# Altium PCB Mainboard.PcbDoc
Units mm, origin at the board's own origin, x right, y up, seen from the top; angles counter-clockwise.
Board outline 57.77 x 40.5 mm, 2 copper layers (Top Layer, Bottom Layer); 29 components, 28 nets, 178 pads, 39 vias.
Unrouted connection lines stored in the file: 22.
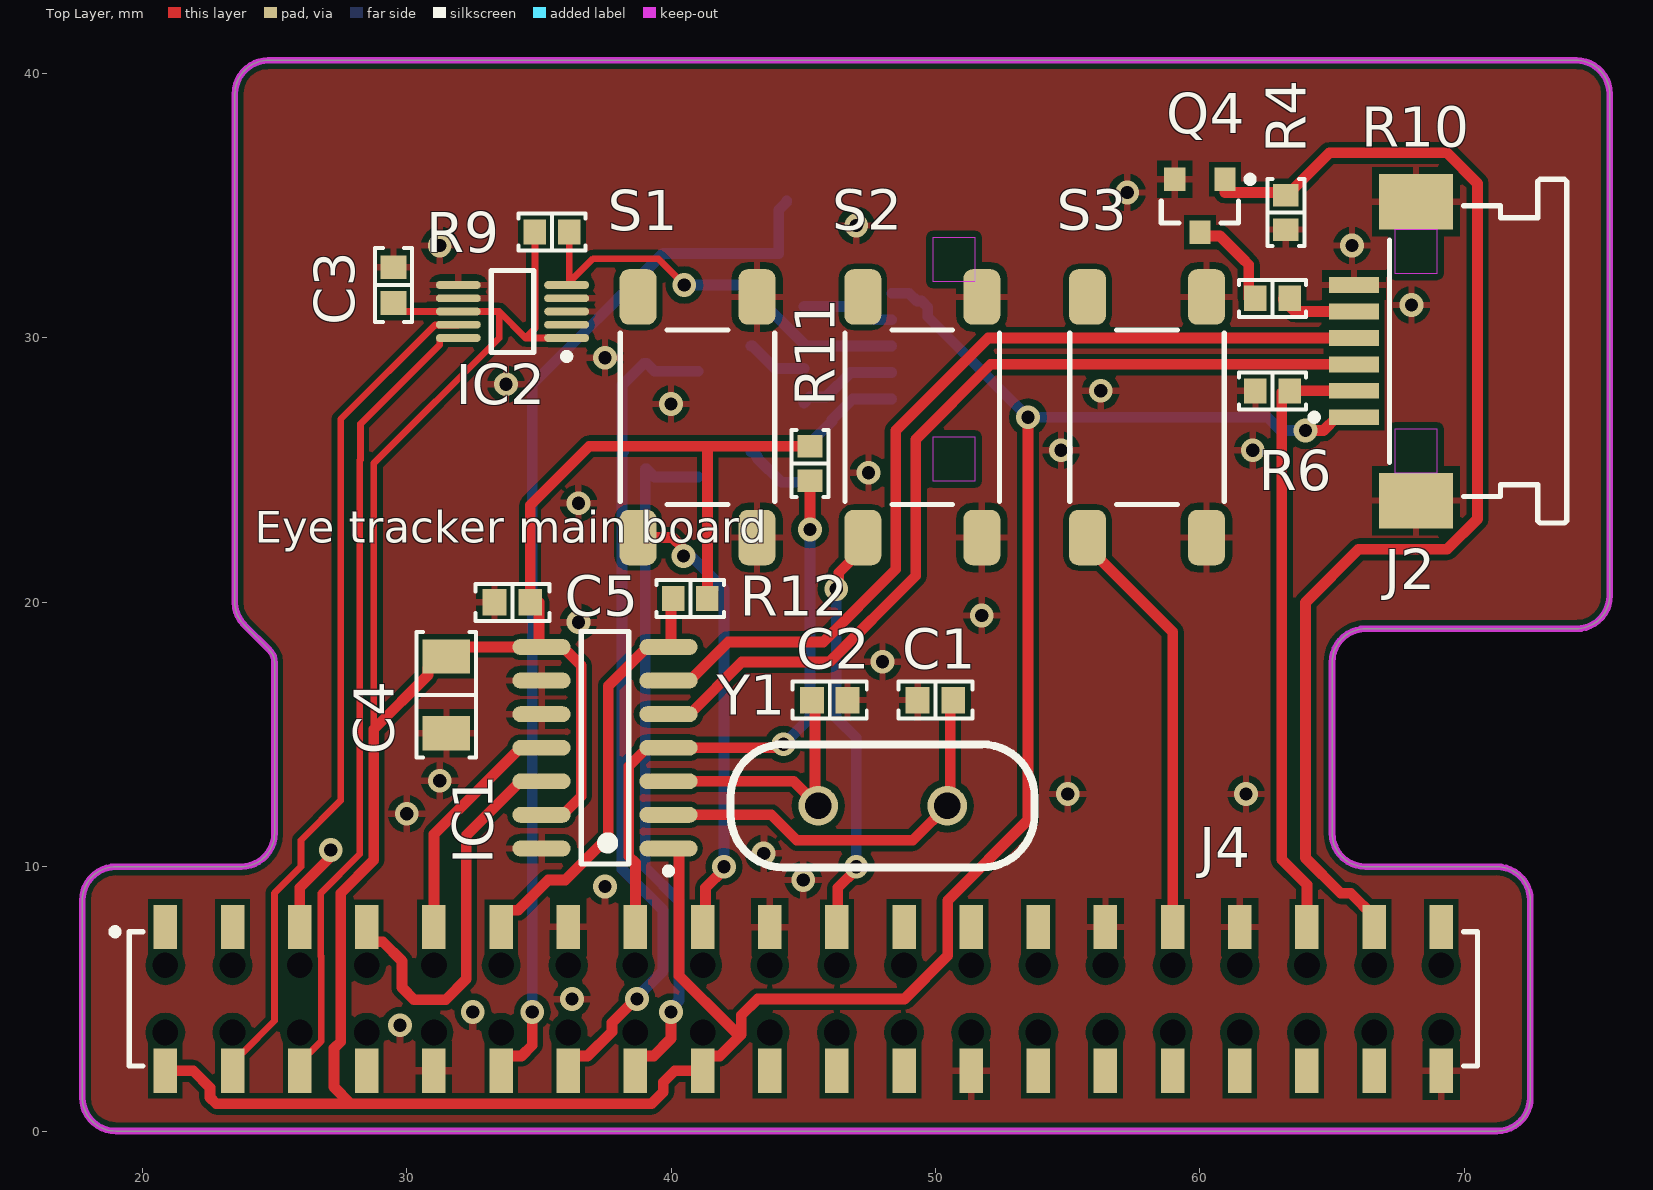
[diagram p0: Top Layer view]
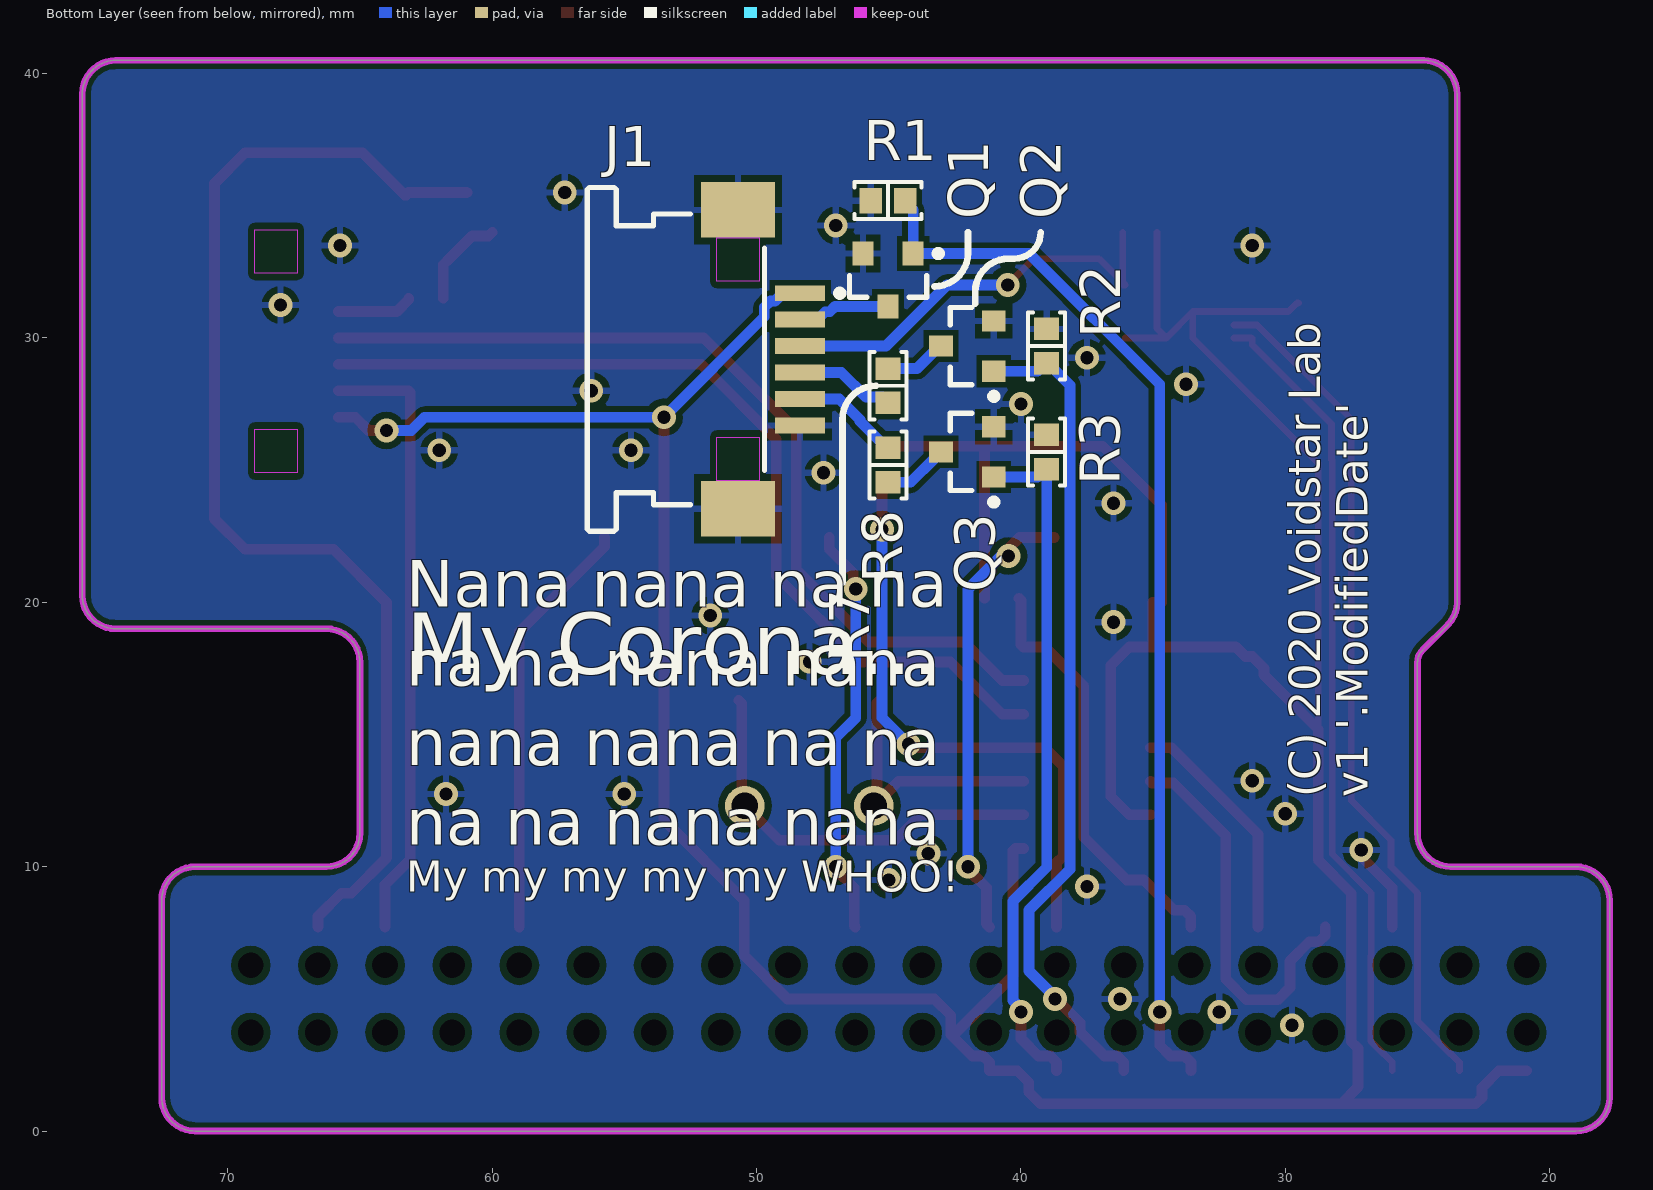
[diagram p1: Bottom Layer view, seen from below]
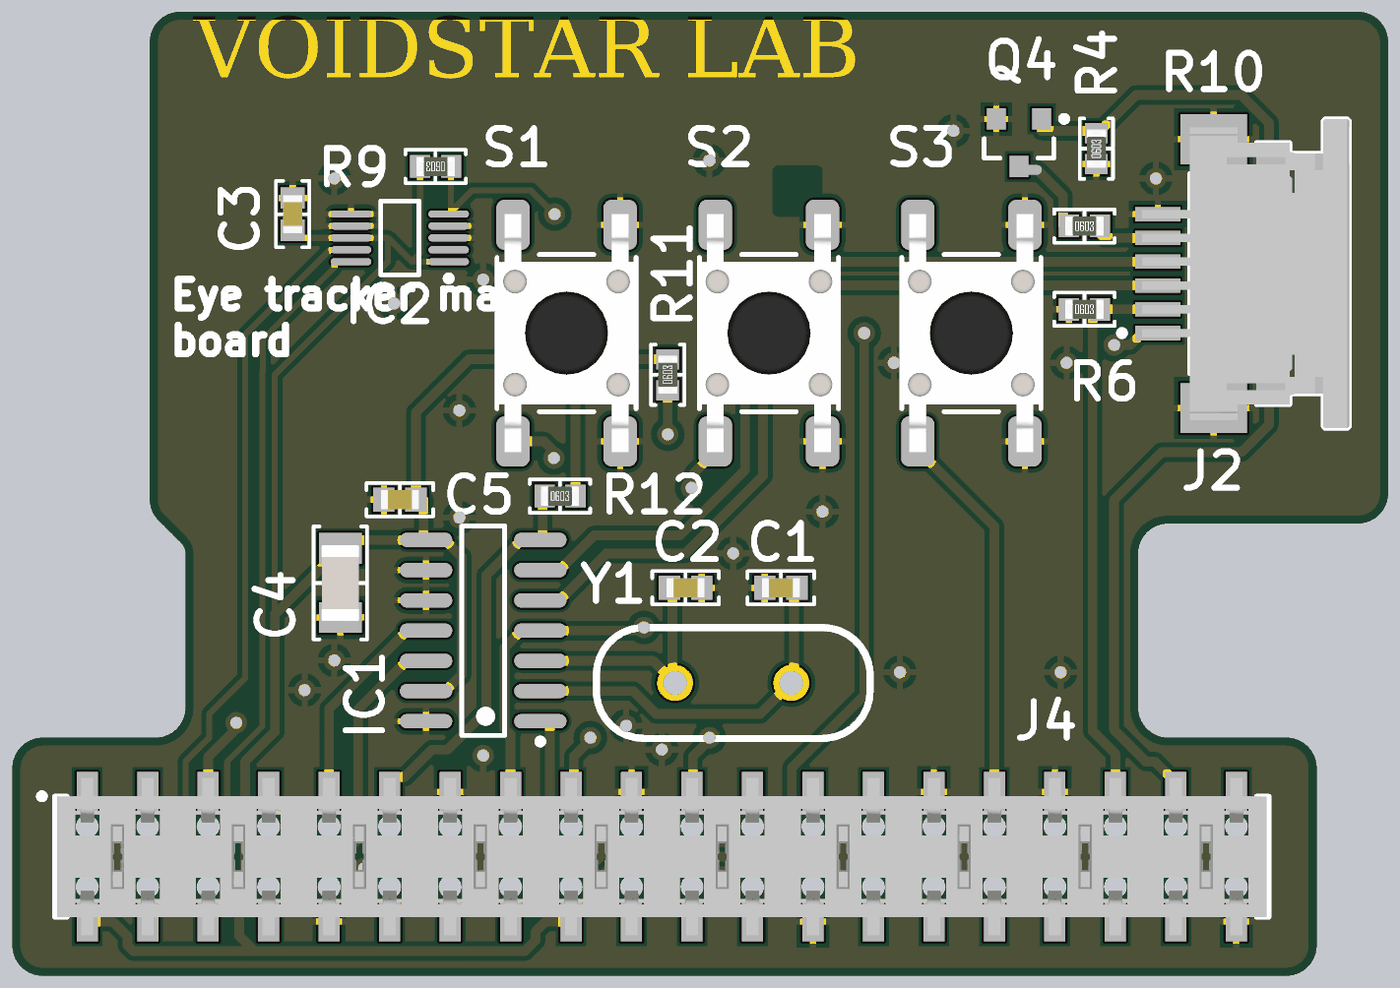
[diagram p2: 3D render of the assembled board from above, using the file's embedded part models]
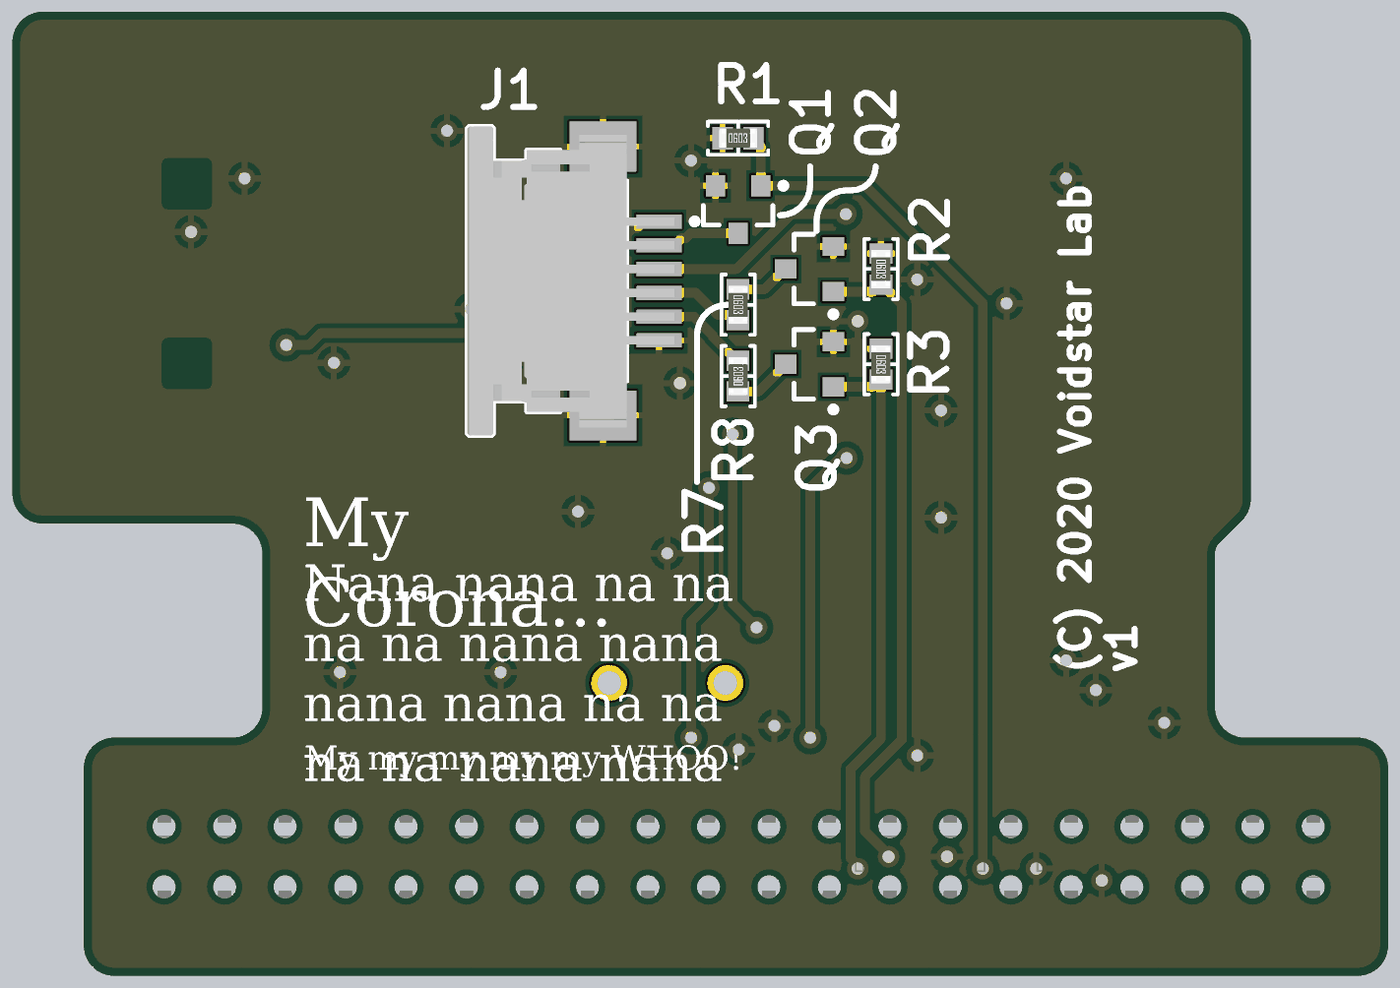
[diagram p3: 3D render of the assembled board from below, using the file's embedded part models]

## Layer stack, top to bottom
Top Solder: solder mask 0.0102, Solder Resist, Dk 3.5
Top Layer: signal copper 0.0356
Dielectric 1: dielectric 0.32, FR-4, Dk 4.8
Bottom Layer: signal copper 0.0356
Bottom Solder: solder mask 0.0102, Solder Resist, Dk 3.5

## Board outline
17.73,1.27 ccw(c19,1.27) 19,0 71.23,0 ccw(c71.23,1.27) 72.5,1.27 72.5,8.73 ccw(c71.23,8.73) 71.23,10 66.27,10 cw(c66.27,11.27) 65,11.27 65,17.73 cw(c66.27,17.73) 66.27,19 74.23,19 ccw(c74.23,20.27) 75.5,20.27 75.5,39.23 ccw(c74.23,39.23) 74.23,40.5 24.77,40.5 ccw(c24.77,39.23) 23.5,39.23 23.5,20 ccw(c24.707,20) 23.854,19.146 24.809,18.191 cw(c24.348,17.73) 25,17.73 25,11.27 cw(c23.73,11.27) 23.73,10 19,10 ccw(c19,8.73) 17.73,8.73

## Design rules (kind name [scope] priority, off if disabled: settings)
Clearance [All] p1: gap=0.254 ignorepadtopadclearanceinfootprint=FALSE except(0: Arc-Hole Track-Hole SMDPad-Hole THPad-Hole Via-Hole Fill-Hole Poly-Hole Region-Hole Text-Hole; 0.2: Arc-Arc Arc-Track Arc-SMDPad Arc-THPad Arc-Fill Arc-Poly Arc-Region Track-Track Track-SMDPad Track-THPad Track-Fill Track-Poly Track-Region SMDPad-SMDPad SMDPad-THPad SMDPad-Fill SMDPad-Poly SMDPad-Region; 0.5: THPad-THPad)
PolygonConnect [All] p1: connectstyle=Relief reliefconductorwidth=0.254 reliefentries=4 polygonreliefangle="90 Angle" airgapwidth=0.254
RoomDefinition Sheet1 [InComponentClass('Sheet1')] p1: confinementstyle=ConfineIn formatcopy=TRUE lockcomponents=FALSE outline 18,1 74.5,1 74.5,37 18,37
RoutingVias [All] p1: holewidth=0.5 width=0.7 viastyle="Through Hole" minholewidth=0.5 minwidth=0.7 maxholewidth=1.2 maxwidth=1.5
SolderMaskExpansion "Tent Vias" [IsVia] p1: expansion=0.102 istentingtop=TRUE
SolderMaskExpansion [All] p2: expansion=0.1 istentingtop=FALSE
Width [All] p1: maxlimit=0.813 minlimit=0.254 preferedwidth=0.406
30 further rules are at their usual default settings.

## Components (designator, comment, footprint, x,y, rotation, side; value= is the part's Value field where it differs from the comment)
C1 "22pF" "CAP 0603_1608" 50,16.3 r180 top
C2 "22pF" "CAP 0603_1608" 46,16.3 r0 top
C3 "0.1µF" "CAP 0603_1608" 29.5,32 r270 top
C4 "10µF" "CAP 1206_3216 - 1.0MM" 31.5,16.5 r90 top
C5 "0.1µF" "CAP 0603_1608" 34,20 r0 top
IC1 "MCP2120-I/SL" SOIC-SL14_N 37.5,14.5 r180 top
IC2 "ADS1115IDGSR" TI-DGS10_N 34,31 r180 top
J1 "52271-0679" MOLX-52271-0679 49.525,29.191 r270 bottom
J2 "52271-0679" MOLX-52271-0679 67,29.5 r90 top
J4 "HLE-120-02-L-DV-BE" SMTC-HLE-120-02-X-DV-BE 45,5 r0 top
Q1 "NVR4003NT3G" ONSC-SOT-23-3-318-08_V 45.025,32.191 r270 bottom
Q2 "NVR4003NT3G" ONSC-SOT-23-3-318-08_V 42.025,29.691 r0 bottom
Q3 "NVR4003NT3G" ONSC-SOT-23-3-318-08_V 42.025,25.691 r0 bottom
Q4 "NVR4003NT3G" ONSC-SOT-23-3-318-08_V 60,35 r270 top
R1 "100 kOhms" "RES 0603_1608" 45.025,35.191 r180 bottom
R2 "100 kOhms" "RES 0603_1608" 39.025,29.691 r270 bottom
R3 "100 kOhms" "RES 0603_1608" 39.025,25.691 r270 bottom
R4 "100 kOhms" "RES 0603_1608" 63.25,34.75 r90 top
R6 "100 kOhms" "RES 0603_1608" 62.75,28 r0 top
R7 "249 Ohms" "RES 0603_1608" 45.025,28.191 r270 bottom
R8 "36 Ohms" "RES 0603_1608" 45.025,25.191 r90 bottom
R9 "=Value" "RES 0603_1608" 35.5,34 r180 top
R10 "249 Ohms" "RES 0603_1608" 62.75,31.5 r0 top
R11 "=Value" "RES 0603_1608" 45.25,25.25 r90 top
R12 "10 kOhms" "RES 0603_1608" 40.725,20.151 r0 top
S1 "FSM6JSMATR" "TE FSM6JSMA" 41,27 r0 top
S2 "FSM6JSMATR" "TE FSM6JSMA" 49.5,27 r0 top
S3 "FSM6JSMATR" "TE FSM6JSMA" 58,27 r0 top
Y1 "7.3728MHz 18pF" "HC-49 PTH" 48,12.3 r0 top

## Footprints (in the part's own frame and the unit in brackets; to place one, negate y for a bottom-side part, rotate by r counter-clockwise, add the part's x,y. Pads: shape width x height; smd on the part's side, far side on the other; paste and mask are expansions set on the pad)
"CAP 0603_1608" [mm] "Chip Capacitor, 2-Leads, Body 1.60x0.80mm, IPC Medium Density"
  rect 0.9x1 smd: 1(-0.675,0) 2(0.675,0)
  silkscreen extent -1.4,-0.7 1.4,0.7, body extent -0.8,-0.41 0.8,0.41, height 0.82
"CAP 1206_3216 - 1.0MM" [mm] "Chip Capacitor, 2-Leads, Body 3.25x1.60mm, IPC Medium Density"
  rect 1.3x1.8 smd: 1(-1.45,0) 2(1.45,0)
  silkscreen extent -2.37,-1.12 2.37,1.12, body extent -1.6,-0.8 1.6,0.8, height 1
"HC-49 PTH" [mm] "Standard HC-49 crystal, through-hole. Height may vary!"
  round 1.5 hole 1: 1(-2.44,0) 2(2.44,0)
  silkscreen extent -5.75,-2.33 5.75,2.33, body extent -6.27,-5.33 5.97,2.35, height 3.5
MOLX-52271-0679 [mm] "FPC Connector, 6-Leads, Right Angle, Pitch 1.0 mm, Mated Height 3.0 mm, SMT"
  rect 0.6x1.9 smd: 1(-2.5,1.175) 2(-1.5,1.175) 3(-0.5,1.175) 4(0.5,1.175) 5(1.5,1.175) 6(2.5,1.175)
  rect 2.1x2.8 smd: MP1(-5.65,-1.175) MP2(5.65,-1.175)
  Keep-Out Layer region: -4.6,-0.375 -2.95,-0.375 -2.95,-1.975 -4.6,-1.975
  Keep-Out Layer region: 2.95,-0.375 4.6,-0.375 4.6,-1.975 2.95,-1.975
  silkscreen extent -6.5,-6.87 6.5,2.8, body extent -6.5,-6.87 6.5,1.83, height 3.01
ONSC-SOT-23-3-318-08_V [mm] "SOT23, 3-Leads, Body 2.92x1.3mm, Pitch 0.95mm"
  rect 0.9x0.8 smd: 1(-1,0.95) 2(-1,-0.95) 3(1,0)
  silkscreen extent -1.12,-1.46 0.65,2.02, body extent -0.65,-1.46 0.65,1.46, height 1.11
"RES 0603_1608" [mm] "Chip Resistor, 2-Leads, Body 1.60x0.80mm, IPC Medium Density"
  rect 0.85x0.95 smd: 1(-0.65,0) 2(0.65,0)
  silkscreen extent -1.27,-0.7 1.27,0.7, body extent -0.8,-0.4 0.8,0.4, height 0.45
SMTC-HLE-120-02-X-DV-BE [mm] "Tiger Beam Socket Assembly, 2x20 Pins, Vertical, 2.54mm Pitch, Female"
  rect 0.889x1.68 smd: 1(-24.13,2.72) 2(-24.13,-2.72) 3(-21.59,2.72) 4(-21.59,-2.72) 5(-19.05,2.72) 6(-19.05,-2.72) 7(-16.51,2.72) 8(-16.51,-2.72) 9(-13.97,2.72) 10(-13.97,-2.72) 11(-11.43,2.72) 12(-11.43,-2.72) 13(-8.89,2.72) 14(-8.89,-2.72) 15(-6.35,2.72) 16(-6.35,-2.72) 17(-3.81,2.72) 18(-3.81,-2.72) 19(-1.27,2.72) 20(-1.27,-2.72) 21(1.27,2.72) 22(1.27,-2.72) 23(3.81,2.72) 24(3.81,-2.72) 25(6.35,2.72) 26(6.35,-2.72) 27(8.89,2.72) 28(8.89,-2.72) 29(11.43,2.72) 30(11.43,-2.72) 31(13.97,2.72) 32(13.97,-2.72) 33(16.51,2.72) 34(16.51,-2.72) 35(19.05,2.72) 36(19.05,-2.72) 37(21.59,2.72) 38(21.59,-2.72) 39(24.13,2.72) 40(24.13,-2.72)
  round 0.67 hole 0.97 unplated: MH1(-24.13,1.27) MH2(-24.13,-1.27) MH3(-21.59,1.27) MH4(-21.59,-1.27) MH5(-19.05,1.27) MH6(-19.05,-1.27) MH7(-16.51,1.27) MH8(-16.51,-1.27) MH9(-13.97,1.27) MH10(-13.97,-1.27) MH11(-11.43,1.27) MH12(-11.43,-1.27) MH13(-8.89,1.27) MH14(-8.89,-1.27) MH15(-6.35,1.27) MH16(-6.35,-1.27) MH17(-3.81,1.27) MH18(-3.81,-1.27) MH19(-1.27,1.27) MH20(-1.27,-1.27) MH21(1.27,1.27) MH22(1.27,-1.27) MH23(3.81,1.27) MH24(3.81,-1.27) MH25(6.35,1.27) MH26(6.35,-1.27) MH27(8.89,1.27) MH28(8.89,-1.27) MH29(11.43,1.27) MH30(11.43,-1.27) MH31(13.97,1.27) MH32(13.97,-1.27) MH33(16.51,1.27) MH34(16.51,-1.27) MH35(19.05,1.27) MH36(19.05,-1.27) MH37(21.59,1.27) MH38(21.59,-1.27) MH39(24.13,1.27) MH40(24.13,-1.27)
  silkscreen extent -26.16,-2.54 25.5,2.66, body extent -25.4,-3.3 25.4,3.3, height 3.66
SOIC-SL14_N [mm] "SOIC, 14-Leads, Body 8.7x3.9mm, Pitch 1.27mm, IPC Medium Density"
  oval 2.2x0.6 smd: 1(-2.4,3.81) 2(-2.4,2.54) 3(-2.4,1.27) 4(-2.4,0) 5(-2.4,-1.27) 6(-2.4,-2.54) 7(-2.4,-3.81) 8(2.4,-3.81) 9(2.4,-2.54) 10(2.4,-1.27) 11(2.4,0) 12(2.4,1.27) 13(2.4,2.54) 14(2.4,3.81)
  silkscreen extent -2.53,-4.4 0.9,4.78, body extent -2,-4.38 2,4.38, height 1.75
"TE FSM6JSMA" [mm]
  rrect50% 1.4x2.1 smd: 1(2.25,4.55) 2(2.25,-4.55) 3(-2.25,4.55) 4(-2.25,-4.55)
  silkscreen extent -2.92,-3.3 2.92,3.3, body extent -3,-5 3,5, height 7.11
TI-DGS10_N [mm] "SOP, 10-Leads, Body 3x3mm, Pitch 0.5mm, IPC Medium Density"
  oval 1.7x0.3 smd: 1(-2.05,1) 2(-2.05,0.5) 3(-2.05,0) 4(-2.05,-0.5) 5(-2.05,-1) 6(2.05,-1) 7(2.05,-0.5) 8(2.05,0) 9(2.05,0.5) 10(2.05,1)
  silkscreen extent -2.18,-1.55 0.8,1.82, body extent -1.55,-1.55 1.55,1.55, height 1.1

## Part data
C1 C2: library part 885012006019, "CAP CER 22PF 16V C0G/NP0 0603", Device Package="0603 (1608 Metric)", Manufacturer="Würth Elektronik", Operating Temperature="-55°C ~ 125°C", Supplier Part Number 1=732-7762-1-ND, Temperature Coefficient="C0G, NP0", Tolerance=±5%, Voltage - Rated=16V, Applications="General Purpose", Capacitance=22pF, ComponentLink1Description=Datasheet, ComponentLink1URL=https://katalog.we-online.de/pbs/datasheet/885012006019.pdf, ComponentLink2Description="DigiKey Link", ComponentLink2URL=http://digikey.com/product-detail/en/w-rth-elektronik/885012006019/732-7762-1-ND/5454389, LastUpdated="1/21/2020 12:01:39 AM", Lifecycle Status=Active, Minimum Order=1, Mounting Type="Surface Mount, MLCC", Package / Case="0603 (1608 Metric)", Packaging=TapeAndReel, Part Number=885012006019, Part Status=Active, PartId=17577, Price=0.02, Series=WCAP-CSGP, Size / Dimension="0.063\" L x 0.031\" W (1.60mm x 0.80mm)", Supplier 1=DigiKey, Thickness (Max)="0.034\" (0.87mm)"
C3 C5: library part C0603C104K5RAC7411, "CAP CER 0.1UF 50V X7R 0603", Device Package="0603 (1608 Metric)", Manufacturer=KEMET, Operating Temperature="-55°C ~ 125°C", Supplier Part Number 1=399-7374-2-ND, Temperature Coefficient=X7R, Tolerance=±10%, Voltage - Rated=50V, Applications="Bypass, Decoupling", Capacitance=0.1µF, ComponentLink1Description=Datasheet, ComponentLink1URL=https://api.kemet.com/component-edge/download/datasheet/C0603C104K5RAC7411.pdf, ComponentLink2Description="DigiKey Link", ComponentLink2URL=http://digikey.com/product-detail/en/kemet/C0603C104K5RAC7411/399-7374-2-ND/3317013, LastUpdated="1/21/2020 12:02:09 AM", Lifecycle Status=Active, Minimum Order=15000, Mounting Type="Surface Mount, MLCC", Package / Case="0603 (1608 Metric)", Packaging=TapeAndReel, Part Number=C0603C104K5RAC7411, Part Status=Active, PartId=2233, Price=0.02, Series="SMD Comm X7R", Size / Dimension="0.063\" L x 0.031\" W (1.60mm x 0.80mm)", Supplier 1=DigiKey, Thickness (Max)="0.035\" (0.90mm)"
C4: library part EMK316BJ106MD-T, "CAP CER 10UF 16V X5R 1206", Device Package="1206 (3216 Metric)", Manufacturer="Taiyo Yuden", Operating Temperature="-55°C ~ 85°C", Supplier Part Number 1=587-4881-1-ND, Temperature Coefficient=X5R, Tolerance=±20%, Voltage - Rated=16V, Applications="General Purpose", Capacitance=10µF, ComponentLink1Description=Datasheet, ComponentLink1URL=http://www.yuden.co.jp/productdata/catalog/mlcc06_e.pdf, ComponentLink2Description="DigiKey Link", ComponentLink2URL=http://digikey.com/product-detail/en/taiyo-yuden/EMK316BJ106MD-T/587-4881-1-ND/6563724, LastUpdated="1/21/2020 12:03:23 AM", Lifecycle Status=Active, Minimum Order=1, Mounting Type="Surface Mount, MLCC", Package / Case="1206 (3216 Metric)", Packaging=TapeAndReel, Part Number=EMK316BJ106MD-T, Part Status=Active, PartId=18996, Price=0.05, Series=M, Size / Dimension="0.126\" L x 0.063\" W (3.20mm x 1.60mm)", Supplier 1=DigiKey, Thickness (Max)="0.037\" (0.95mm)"
IC1: "Infrared Encoder/Decoder, 14-Pin SOIC, Industrial Temperature", Manufacturer=Microchip, Supplier Part Number 1=MCP2120-I/SL-ND, Code_IPC=SOIC127P600-14, Code_JEDEC=MS-012-AB, ComponentLink1Description="Manufacturer URL", ComponentLink1URL=http://www.microchip.com/, ComponentLink2Description=Datasheet, ComponentLink2URL=http://ww1.microchip.com/downloads/en/DeviceDoc/21618b.pdf, ComponentLink3Description="Package Specification", ComponentLink3URL=http://www.microchip.com/stellent/groups/techpub_sg/documents/packagingspec/en012702.pdf, DatasheetVersion="revB, Feb-2007", Mounting Technology="Surface Mount", PackageDescription="14-Lead Plastic Small Outline (SL) - Narrow, 3.90mm Body [SOIC]", PackageReference=SOIC-SL14, PackageVersion="revBB, Aug-2009", PartNumber=MCP2120-I/SL, Supplier 1=Digi-Key, Supplier 2=Farnell, Supplier 3=Newark, Supplier 4=Mouser, Supplier Part Number 2=1084305, Supplier Part Number 3=33C0867, Supplier Part Number 4=579-MCP2120ISL
IC2: "16-Bit ADC with Integrated Multiplexer, PGA, Comparator, Oscillator, and Reference, -40 to 125 degC, 10-pin SOP (DGS10), Green (RoHS & no Sb/Br)", Analog Voltage AV/DD(Max)(V)=5.5, Analog Voltage AV/DD(Min)(V)=2, Manufacturer="Texas Instruments", Supplier Part Number 1=296-13060-2-ND, # Input Channels=4, Architecture=Delta-Sigma, Code_JEDEC=MO-153, ComponentLink1Description="Manufacturer URL", ComponentLink1URL=http://www.ti.com/, ComponentLink2Description=Datasheet, ComponentLink2URL=http://www.ti.com/general/docs/lit/getliterature.tsp?genericPartNumber=ADS1115&fileType=pdf, ComponentLink3Description="Package Specification", ComponentLink3URL=http://www.ti.com/lit/ml/mpds035b/mpds035b.pdf, DatasheetVersion=SBAS444B, Digital Supply(Max)(V)=5.5, Digital Supply(Min)(V)=2, Eco-Plan="Green (RoHS & no Sb/Br)", INL(Max)(+/-LSB)=1, Interface="Serial I2C", Mounting Technology="Surface Mount", PackageDescription="10-Pin Plastic Small Outline, Body 3 x 3 mm, Pitch 0.5 mm", PackageReference=DGS10, PackageVersion="4073272/C, 02/2004", PartNumber=ADS1115IDGSR, Resolution(Bits)=16, Sample Rate (max)(SPS)=860, SubFamily="Precision ADC (<=10MSPS)", Supplier 1=Digi-Key, Supplier 2=Digi-Key, Supplier 3=Digi-Key, Supplier 4=Newark, Supplier 5=Mouser, Supplier Part Number 2=296-13060-1-ND, Supplier Part Number 3=296-13060-6-ND, Supplier Part Number 4=74C7007, Supplier Part Number 5=595-ADS1253E/2K5
J1 J2: "1.0 mm Pitch Easy-On(TM) Type FPC Connector, 3.0 mm Mated Height, Right Angle, ZIF, SMT, Bottom Contact, 6 Circuits, -40 to 85 degC, ELV and RoHS Compliant, Tape and Reel", Current (Max per Contact)=0.5A, Manufacturer=Molex, Supplier Part Number 1=1079950, Voltage (Max)="50V AC (RMS)/DC", Circuits (Loaded)=6, ComponentLink1Description="Manufacturer URL", ComponentLink1URL=http://www.molex.com/molex/index.jsp, ComponentLink2Description=Datasheet, ComponentLink2URL=http://www.molex.com/webdocs/datasheets/pdf/en-us/0522710679_FFC_FPC_CONNECTORS.pdf, ComponentLink3Description="Package Specification", ComponentLink3URL=http://www.molex.com/pdm_docs/sd/522710679_sd.pdf, Contact Position=Bottom, Durability (mating cycles max)=30, Entry Angle="90degrees Angle", Mated Height=3.00mm, Material - Metal="Phosphor Bronze", Material - Plating Mating=Tin-Bismuth, Material - Plating Termination=Tin-Bismuth, Mounting Technology="Surface Mount", Number of Rows=1, Orientation="Right Angle", PackageDescription="6-Lead FPC Connector, Pitch 1.0 mm", PackageReference=52271-0679, PackageVersion="Rev. B, 04/2004", Packing="Tape and Reel", PartNumber=52271-0679, PCB Locator=No, PCB Retention=Yes, Pitch - Mating Interface=1.00mm, Pitch - Termination Interface=1.00mm, Polarized to PCB=Yes, RoHS=TRUE, Stackable=No, Supplier 1=Farnell, Supplier 2=Newark, Supplier 3=Mouser, Supplier Part Number 2=58J9529, Supplier Part Number 3=538-52271-0679, System=Connector
J4: "Cost-Effective Reliable Socket, Surface Mount, Vertical, -55 to 125 degC, 2.54 mm Pitch, 40-Pin, Female, RoHS", Manufacturer=Samtec, Temperature Range="-55 to 125 degC", ComponentLink1Description="Manufacturer URL", ComponentLink1URL=http://www.samtec.com, ComponentLink2Description=Datasheet, ComponentLink2URL=http://www.samtec.com/documents/webfiles/pdf/HLE.PDF, ComponentLink3Description="Package Specification", ComponentLink3URL=http://www.samtec.com/documents/webfiles/cpdf/HLE-1XX-02-XXX-DV-XX-XX-XX-MKT.pdf, DatasheetVersion=F-214, Mounting Technology="Surface Mount", Orientation=Vertical, PackageDescription=".100 Tiger Beam Socket Assembly", PackageReference=HLE-120-02-X-DV-BE, PackageVersion="AQ, 12/1998", PartNumber=HLE-120-02-L-DV-BE, Pitch="2.54 mm", RoHS=True
Q1 Q2 Q3 Q4: "Small Signal MOSFET, 30 V, 0.56 A, Single N-Channel, 3-Pin SOT-23, Pb-Free, Tape and Reel", Manufacturer="On Semiconductor", Package Type=SOT-23-3, Supplier Part Number 1=NVR4003NT3G-ND, Channel Polarity="N Channel", Ciss Typ (pF)=21, ComponentLink1Description="Manufacturer URL", ComponentLink1URL=http://www.onsemi.com/, ComponentLink2Description=Datasheet, ComponentLink2URL=http://www.onsemi.cn/pub_link/Collateral/NTR4003N-D.PDF, ComponentLink3Description="Package Specification", ComponentLink3URL=http://www.onsemi.cn/pub_link/Collateral/318-08.PDF, Configuration=Single, Coss Typ (pF)=19.7, Crss Typ (pF)=8.1, DatasheetVersion="Rev. 3", ID Max (A)=0.56, Mounting Technology="Surface Mount", PackageDescription="3-Pin Small Outline Transistor, Body 2.92 x 1.3 mm, Pitch 0.95 mm", PackageReference=SOT-23-3-318-08, PackageVersion="Rev. AP, 11/2009", Packing="Tape and Reel", PartNumber=NVR4003NT3G, RoHS=Pb-Free, Supplier 1=Digi-Key, Supplier 2=Newark, Supplier 3=Mouser, Supplier Part Number 2=76T6792, Supplier Part Number 3=863-NVR4003NT3G, V(BR)DSS Min (V)=30, VGS Max (V)=20, VGS(th) Max (V)=1.4
R1 R2 R3 R4 R6: library part CPF0603B100KE, "RES SMD 100K OHM 0.1% 1/16W 0603", Device Package="0603 (1608 Metric)", Manufacturer="TE Connectivity Passive Product", Operating Temperature="-55°C ~ 155°C", Power (Watts)="0.063W, 1/16W", Supplier Device Package=0603, Supplier Part Number 1=A119912CT-ND, Temperature Coefficient=±25ppm/°C, Tolerance=±0.1%, ComponentLink1Description=Datasheet, ComponentLink1URL=https://www.te.com/commerce/DocumentDelivery/DDEController?Action=srchrtrv&DocNm=1773200&DocType=DS&DocLang=English, ComponentLink2Description="DigiKey Link", ComponentLink2URL=http://digikey.com/product-detail/en/te-connectivity-passive-product/CPF0603B100KE/A119912CT-ND/4966510, Composition="Thin Film", Height - Seated (Max)="0.022\" (0.55mm)", LastUpdated="1/21/2020 12:24:55 AM", Lifecycle Status=Active, Minimum Order=1, Number of Terminations=2, Package / Case="0603 (1608 Metric)", Packaging=TapeAndReel, Part Number=CPF0603B100KE, Part Status=Active, PartId=4883, Price=0.09, Resistance="100 kOhms", Series="CPF, Neohm", Size / Dimension="0.061\" L x 0.031\" W (1.55mm x 0.80mm)", Supplier 1=DigiKey
R7 R10: library part ERJ-3EKF2490V, "RES SMD 249 OHM 1% 1/10W 0603", Device Package="0603 (1608 Metric)", Manufacturer="Panasonic Electronic Components", Operating Temperature="-55°C ~ 155°C", Power (Watts)="0.1W, 1/10W", Ratings=AEC-Q200, Supplier Device Package=0603, Supplier Part Number 1=P249HCT-ND, Temperature Coefficient=±100ppm/°C, Tolerance=±1%, ComponentLink1Description=Datasheet, ComponentLink1URL=https://industrial.panasonic.com/cdbs/www-data/pdf/RDA0000/AOA0000C304.pdf, ComponentLink2Description="DigiKey Link", ComponentLink2URL=http://digikey.com/product-detail/en/panasonic-electronic-components/ERJ-3EKF2490V/P249HCT-ND/198274, Composition="Thick Film", Features="Automotive AEC-Q200", Height - Seated (Max)="0.022\" (0.55mm)", LastUpdated="1/21/2020 12:14:40 AM", Lifecycle Status=Active, Minimum Order=1, Number of Terminations=2, Package / Case="0603 (1608 Metric)", Packaging=TapeAndReel, Part Number=ERJ-3EKF2490V, Part Status=Active, PartId=26079, Price=0.01, Resistance="249 Ohms", Series=ERJ, Size / Dimension="0.063\" L x 0.031\" W (1.60mm x 0.80mm)", Supplier 1=DigiKey
R8: library part RK73H1JTTD36R0F, "RES 36 OHM 1% 1/8W 0603", Device Package="0603 (1608 Metric)", Manufacturer="KOA Speer Electronics, Inc.", Operating Temperature="-55°C ~ 155°C", Power (Watts)="0.125W, 1/8W", Ratings=AEC-Q200, Supplier Device Package=0603, Supplier Part Number 1=2019-RK73H1JTTD36R0FCT-ND, Temperature Coefficient=±100ppm/°C, Tolerance=±1%, ComponentLink1Description=Datasheet, ComponentLink1URL=http://www.koaspeer.com/catimages/Products/RK73H/RK73H.pdf, ComponentLink2Description="DigiKey Link", ComponentLink2URL=http://digikey.com/product-detail/en/koa-speer-electronics-inc/RK73H1JTTD36R0F/2019-RK73H1JTTD36R0FCT-ND/9847473, Composition="Thick Film", Features="Automotive AEC-Q200, Moisture Resistant", Height - Seated (Max)="0.022\" (0.55mm)", LastUpdated="1/21/2020 12:23:23 AM", Lifecycle Status=Active, Minimum Order=1, Number of Terminations=2, Package / Case="0603 (1608 Metric)", Packaging=CutTape, Part Number=RK73H1JTTD36R0F, Part Status=Active, PartId=8854, Price=0.10, Resistance="36 Ohms", Series=RK73H, Size / Dimension="0.063\" L x 0.031\" W (1.60mm x 0.80mm)", Supplier 1=DigiKey
R9 R11: library part RNCS0603BKE10K0, "RES 10K OHM 0.1% 1/16W 0603", Device Package="0603 (1608 Metric)", Manufacturer="Stackpole Electronics Inc", Operating Temperature="-55°C ~ 155°C", Power (Watts)="0.063W, 1/16W", Ratings=AEC-Q200, Resistance="10 kOhms", Supplier Device Package=0603, Supplier Part Number 1=RNCS0603BKE10K0CT-ND, Temperature Coefficient=±25ppm/°C, Tolerance=±0.1%, ComponentLink1Description=Datasheet, ComponentLink1URL=https://www.seielect.com/catalog/sei-rncs_rnch.pdf, ComponentLink2Description="DigiKey Link", ComponentLink2URL=http://digikey.com/product-detail/en/stackpole-electronics-inc/RNCS0603BKE10K0/RNCS0603BKE10K0CT-ND/1800113, Composition="Thin Film", Features="Anti-Corrosive, Automotive AEC-Q200, Moisture Resistant", Height - Seated (Max)="0.022\" (0.55mm)", LastUpdated="1/21/2020 12:25:01 AM", Lifecycle Status=Active, Minimum Order=1, Number of Terminations=2, Package / Case="0603 (1608 Metric)", Packaging=TapeAndReel, Part Number=RNCS0603BKE10K0, Part Status=Active, PartId=4838, Price=0.08, Series=RNCS, Size / Dimension="0.061\" L x 0.031\" W (1.55mm x 0.80mm)", Supplier 1=DigiKey
R12: library part RNCS0603BKE10K0, "RES 10K OHM 0.1% 1/16W 0603", Device Package="0603 (1608 Metric)", Manufacturer="Stackpole Electronics Inc", Operating Temperature="-55°C ~ 155°C", Power (Watts)="0.063W, 1/16W", Ratings=AEC-Q200, Supplier Device Package=0603, Supplier Part Number 1=RNCS0603BKE10K0CT-ND, Temperature Coefficient=±25ppm/°C, Tolerance=±0.1%, ComponentLink1Description=Datasheet, ComponentLink1URL=https://www.seielect.com/catalog/sei-rncs_rnch.pdf, ComponentLink2Description="DigiKey Link", ComponentLink2URL=http://digikey.com/product-detail/en/stackpole-electronics-inc/RNCS0603BKE10K0/RNCS0603BKE10K0CT-ND/1800113, Composition="Thin Film", Features="Anti-Corrosive, Automotive AEC-Q200, Moisture Resistant", Height - Seated (Max)="0.022\" (0.55mm)", LastUpdated="1/21/2020 12:25:01 AM", Lifecycle Status=Active, Minimum Order=1, Number of Terminations=2, Package / Case="0603 (1608 Metric)", Packaging=TapeAndReel, Part Number=RNCS0603BKE10K0, Part Status=Active, PartId=4838, Price=0.08, Resistance="10 kOhms", Series=RNCS, Size / Dimension="0.061\" L x 0.031\" W (1.55mm x 0.80mm)", Supplier 1=DigiKey
S1 S2 S3: "SWITCH TACTILE SPST-NO 0.05A 24V", Contact Rating @ Voltage="0.05A @ 24VDC", Manufacturer="TE Connectivity ALCOSWITCH Switches", Operating Force=160gf, Operating Temperature="-35°C ~ 85°C", Supplier Part Number 1=450-2058-1-ND, Actuator Height off PCB, Vertical=7.00mm, Actuator Orientation="Top Actuated", Actuator Type=Standard, Circuit=SPST-NO, ComponentLink1Description=Datasheet, ComponentLink1URL=https://www.te.com/commerce/DocumentDelivery/DDEController?Action=srchrtrv&DocNm=1308111-1_SWITCHES_CORE_PROGRAM_CATALOG&DocType=CS&DocLang=English, ComponentLink2Description="DigiKey Link", ComponentLink2URL=http://digikey.com/product-detail/en/te-connectivity-alcoswitch-switches/FSM6JSMATR/450-2058-1-ND/4569748, Illumination=Non-Illuminated, LastUpdated="2/4/2020 2:39:39 PM", Lifecycle Status=Active, Minimum Order=1, Mounting Type="Surface Mount", Outline="6.00mm x 6.00mm", Packaging=TapeAndReel, Part Number=FSM6JSMATR, Part Status=Active, Price=0.25, Series=FSMJSMA, Supplier 1=DigiKey, Switch Function=Off-Mom, Termination Style="Gull Wing"
Y1: library part Xtal, "Standard crystal"

## Via types
v1: diameter 0.9, hole 0.5, Top Layer to Bottom Layer, tented both sides, 39 vias

## Nets (pads, with @x,y where several pads share a name; then routed paths per layer and width w, separated by ;. In a path a pad name is that pad's centre, name@x,y a point inside that pad or via, vN(x,y) a via of type N, cw(c..) or ccw(c..) an arc to the next point about the centre after c; other vN are vias at no path point)
BLINK_L: IC2.5 J1.3 R9.1 | length 16.2
  Top Layer w0.254: R9.1 36.15,32.021 36.129,32 IC2.5 37.05,33 39.5,33 v1(40.5,32)
  Bottom Layer w0.406: v1(40.5,32) 42.796,32 45.105,29.691 J1.3
BUTTON_1: J4.17 S1.3 S1.4 | length 17.3
  Top Layer w0.406: S1.4 40.05,22.45 40.441,22.059 40.441,21.777 v1(40.468,21.75) ; J4.17 41.303,7.833 41.303,9.2 42,9.897 v1(42,10)
  Bottom Layer w0.406: v1(40.468,21.75) 40.75,21.75 42,20.5 v1(42,10)
BUTTON_2: J4.21 S2.3 S2.4 | length 15.8
  Top Layer w0.406: v1(46.25,20.5) 46.345,20.595 46.345,21.115 47.25,22.02 S2.4 ; J4.21 46.303,7.753 46.303,9.2 47,9.897 v1(47,10)
  Bottom Layer w0.406: v1(46.25,20.5) 46.25,15.625 47,14.875 v1(47,10)
BUTTON_3: J4.31 S3.3 S3.4 | length 16.1
  Top Layer w0.406: S3.4 55.75,22.1 58.97,18.88 J4.31
GND: C1.2 C2.2 C3.1 C4.1 C5.1 IC1.9 IC1.10 IC1.14 IC2.3 IC2.4 IC2.6 IC2.7 J1.6 J1.MP1 J1.MP2 J2.6 J2.MP1 J2.MP2 J4.5 J4.10 J4.13 J4.19 J4.26 J4.29 J4.33 J4.40 Q1.2 Q2.2 Q3.2 Q4.2 R1.1 R2.1 R3.1 R4.1 R6.1 S1.1 S1.2 S2.1 S2.2 S3.1 S3.2 | length 3.4
  Top Layer w0.406: J4.5 25.95,9.2 27.127,10.377 v1(27.127,10.627)
  other v1: 29.75,4 32.5,4.5 36.25,5 37.5,9.25 45,9.5 43.5,10.5 30,12 55,12.75 61.75,12.75 31.25,13.25 48,17.75 36.5,19.25 51.75,19.5 36.5,23.75 47.466,24.897 54.75,25.75 62,25.75 40,27.5 56.25,28 33.75,28.25 37.5,29.25 68,31.25 31.25,33.5 65.75,33.5 47,34.25 57.25,35.5
IR_XC_EN: J2.2 J4.35 R6.2 | length 23.4
  Top Layer w0.406: J4.35 64.05,9.316 63.093,10.273 63.093,27.943 63.15,28 J2.2
LED_IR_EN: J4.12 Q1.1 R1.2 | length 40.3
  Top Layer w0.406: J4.12 33.57,2.601 33.811,2.842 34.342,2.842 34.75,3.25 v1(34.75,4.5)
  Bottom Layer w0.406: v1(34.75,4.5) 34.75,28.25 39.691,33.191 Q1.1 44.075,34.841 44.375,35.141 R1.2
LED_IR_L: J1.2 Q1.3 | length 3.5
  Bottom Layer w0.406: Q1.3 47.03,31.191 47.233,30.988 47.403,30.988 47.7,30.691 J1.2
LED_REC: J2.5 R10.2 | length 2.9
  Top Layer w0.406: R10.2@63.15,31.5 63.15,31.45 63.6,31 J2.5
LED_REC_EN: J4.37 Q4.1 R4.2 | length 44.8
  Top Layer w0.406: 60.95,35.5 63.15,35.5 R4.2 63.3,35.4 64.9,37 69.345,37 70.5,35.845 70.5,23.155 69.348,22.003 66.003,22.003 63.997,19.997 63.997,10.328 65.328,8.997 65.708,8.997 66.59,8.116 J4.37
LED_STATUS_B: J1.5 R8.2 | length 4.1
  Bottom Layer w0.406: R8.2 45.075,25.841 46.086,26.852 46.086,26.902 46.875,27.691 J1.5
LED_STATUS_B_EN: J4.16 Q3.1 R3.2 | length 26.4
  Top Layer w0.406: J4.16 38.65,2.601 38.891,2.842 39.342,2.842 40,3.5 v1(40,4.5)
  Bottom Layer w0.406: v1(40,4.5) 40,4.634 40.302,4.935 40.302,8.698 39.025,9.975 R3.2 39.075,25.041 39.375,24.741 Q3.1
LED_STATUS_R: J1.4 R7.2 | length 3.8
  Bottom Layer w0.406: R7.2 45.247,27.763 45.862,27.763 46.79,28.691 J1.4
LED_STATUS_R_EN: J4.14 Q2.1 R2.2 | length 31.8
  Top Layer w0.406: J4.14 36.11,2.601 36.351,2.842 36.842,2.842 37.762,3.762 37.762,4.098 38.664,5 v1(38.707,5)
  Bottom Layer w0.406: v1(38.707,5) 38.707,5.071 39.695,6.059 39.695,8.359 38.147,9.908 38.147,25.633 38.205,25.691 38.147,25.749 38.147,28.213 38.975,29.041 R2.2 39.075,29.041 39.375,28.741 Q2.1
MODE_CODEC: IC1.7 J4.11 R12.1 | length 16.2
  Top Layer w0.406: J4.11 33.57,8.116 33.811,8.357 34.207,8.357 35.35,9.5 36,9.5 37.627,11.127 37.627,16.837 39.1,18.31 IC1.7 39.99,18.4 40,18.4 40,20.076 R12.1
NetC1_1: C1.1 IC1.2 Y1.2 | length 15.6
  Top Layer w0.406: IC1.2 43.79,11.96 44.75,11 49.14,11 50.554,12.414 50.554,16.179 C1.1
NetC2_1: C2.1 IC1.3 Y1.1 | length 10
  Top Layer w0.406: IC1.3 44.63,13.23 Y1.1@45.446,12.414 ; C2.1 45.446,16.179 Y1.1@45.446,12.414 ; Y1.1 Y1.1@45.446,12.414
NetQ2_3: Q2.3 R7.1 | length 2.4
  Bottom Layer w0.406: Q2.3 43.075,29.691 43.925,28.841 R7.1
NetQ3_3: Q3.3 R8.1 | length 2.5
  Bottom Layer w0.406: Q3.3 43.075,25.691 43.272,25.494 43.272,25.444 44.175,24.541 R8.1
NetQ4_3: Q4.3 R10.1 | length 3.6
  Top Layer w0.406: Q4.3 60.142,33.858 60.757,33.858 61.612,33.003 61.85,32.765 R10.1@61.85,31.5
RESET_CODEC: IC1.4 J4.15 R11.1 | length 22.8
  Top Layer w0.406: J4.15 38.65,10.146 38.397,10.399 38.397,13.797 39.1,14.5 IC1.4 44.12,14.5 v1(44.25,14.63) ; v1(45.25,22.75) R11.1
  Bottom Layer w0.406: v1(44.25,14.63) 45.25,15.63 v1(45.25,22.75)
RX_IR: IC1.5 J2.3 | length 34.4
  Top Layer w0.406: IC1.5 40.7,15.77 42.675,17.745 45.995,17.745 49.25,21 49.25,26.161 52.089,29 J2.3
RX_RPI: IC1.11 J4.9 | length 8.9
  Top Layer w0.406: J4.9 31.03,11.23 34.3,14.5 IC1.11
SCL: IC2.10 J4.6 | length 30.6
  Top Layer w0.254: J4.6 25.95,2.601 26.267,2.918 26.286,2.918 26.762,3.394 26.762,6.606 26.75,6.618 26.75,9 28.22,10.47 28.22,25.362 28.25,25.392 28.25,26.75 31.254,29.754 31.254,29.979 31.275,30 IC2.10
SDA: IC2.9 J4.4 | length 32.3
  Top Layer w0.254: J4.4 23.41,2.601 23.727,2.918 23.746,2.918 25,4.172 25,9 26,10 26,11 27.5,12.5 27.5,26.925 31.067,30.491 31.941,30.491 IC2.9
TX_IR: IC1.6 J2.4 | length 34.4
  Top Layer w0.406: IC1.6 40.7,17.04 42.16,18.5 45.75,18.5 48.5,21.25 48.5,26.5 52,30 J2.4
TX_RPI: IC1.12 J4.7 | length 15.1
  Top Layer w0.406: J4.7 28.49,7.4 28.731,7.158 29.092,7.158 29.821,6.429 29.821,5.429 30.279,4.971 31.471,4.971 32.25,5.75 32.25,11.18 34.237,13.167 35.037,13.167 IC1.12
VCC: C3.2 C4.2 C5.2 IC1.1 IC1.8 IC1.13 IC2.1 IC2.8 J1.1 J2.1 J4.2 J4.18 R9.2 R11.2 R12.2 | length 166.9
  Top Layer w0.254: 28.75,15.2 28.75,25.25 33.5,30 33.5,30.996 ; C3.2 29.55,31.325 29.875,31 IC2.8 33.496,31 33.5,30.996 ; R9.2 34.85,30.354 34.496,30 ; IC2.1 34.496,30 ; 33.5,30.996 34.496,30
  Top Layer w0.406: J4.2 21.923,2.28 22.562,1.641 22.562,1.273 22.799,1.037 27.879,1.037 ; IC1.13 35.9,11.96 36.603,12.663 36.603,17.607 35.9,18.31 IC1.8 IC1.8@35.09,18.31 ; IC1.1 40.212,10.69 40.302,10.6 40.302,5.874 42.224,3.952 42.588,3.588 ; R12.2 41.375,25.775 41.25,25.9 ; R11.2 41.25,25.9 ; v1(53.5,27) 53.5,11.763 50.462,8.725 50.462,6.638 48.824,5 43.277,5 42.657,4.38 42.657,3.657 42.588,3.588 ; v1(64,26.5) 64.675,26.5 65.175,27 J2.1 ; 27.879,1.037 27.25,1.666 27.25,3.132 27.5,3.382 27.5,9 28.75,10.25 28.75,15.2 30.803,17.253 30.803,17.503 31.25,17.95 C4.2 31.86,18.31 IC1.8@35.09,18.31 ; 27.879,1.037 39.261,1.037 39.699,1.475 39.699,1.842 40.136,2.28 J4.18 41.19,2.601 41.431,2.842 41.842,2.842 42.588,3.588 ; IC1.8@35.09,18.31 35,18.4 35,20 C5.2 34.675,23.675 36.9,25.9 41.25,25.9
  Bottom Layer w0.406: J1.1 49,31.691 49.297,31.394 49.467,31.394 49.703,31.158 49.703,30.797 v1(53.5,27) 62.557,27 63.057,26.5 v1(64,26.5)
pads on no net: IC2.2 J4.1 J4.3 J4.8 J4.20 J4.22 J4.23 J4.24 J4.25 J4.27 J4.28 J4.30 J4.32 J4.34 J4.36 J4.38 J4.39 J4.MH1 J4.MH2 J4.MH3 J4.MH4 J4.MH5 J4.MH6 J4.MH7 J4.MH8 J4.MH9 J4.MH10 J4.MH11 J4.MH12 J4.MH13 J4.MH14 J4.MH15 J4.MH16 J4.MH17 J4.MH18 J4.MH19 J4.MH20 J4.MH21 J4.MH22 J4.MH23 J4.MH24 J4.MH25 J4.MH26 J4.MH27 J4.MH28 J4.MH29 J4.MH30 J4.MH31 J4.MH32 J4.MH33 J4.MH34 J4.MH35 J4.MH36 J4.MH37 J4.MH38 J4.MH39 J4.MH40

## Polygon pours and split planes (outlines as drawn)
GND on Bottom Layer "BOTTOM GND" (solid, pour order 6): 17.73,1.27 ccw(c19,1.27) 19,0 71.23,0 ccw(c71.23,1.27) 72.5,1.27 72.5,8.73 ccw(c71.23,8.73) 71.23,10 66.27,10 cw(c66.27,11.27) 65,11.27 65,17.73 cw(c66.27,17.73) 66.27,19 74.23,19 ccw(c74.23,20.27) 75.5,20.27 75.5,39.23 ccw(c74.23,39.23) 74.23,40.5 24.77,40.5 ccw(c24.77,39.23) 23.5,39.23 23.5,20 ccw(c24.707,20) 23.854,19.146 24.809,18.191 cw(c24.348,17.73) 25,17.73 25,11.27 cw(c23.73,11.27) 23.73,10 19,10 ccw(c19,8.73) 17.73,8.73
GND on Top Layer "TOP GND" (solid, pour order 2): 17.73,1.27 ccw(c19,1.27) 19,0 71.23,0 ccw(c71.23,1.27) 72.5,1.27 72.5,8.73 ccw(c71.23,8.73) 71.23,10 66.27,10 cw(c66.27,11.27) 65,11.27 65,17.73 cw(c66.27,17.73) 66.27,19 74.23,19 ccw(c74.23,20.27) 75.5,20.27 75.5,39.23 ccw(c74.23,39.23) 74.23,40.5 24.77,40.5 ccw(c24.77,39.23) 23.5,39.23 23.5,20 ccw(c24.707,20) 23.854,19.146 24.809,18.191 cw(c24.348,17.73) 25,17.73 25,11.27 cw(c23.73,11.27) 23.73,10 19,10 ccw(c19,8.73) 17.73,8.73

## Keep-outs
Keep-Out Layer:
  lines w0.254: 19,0 cw(c19,1.27) 17.73,1.27 17.73,8.73 cw(c19,8.73) 19,10 23.73,10 ccw(c23.73,11.27) 25,11.27 25,17.73 ccw(c24.348,17.73) 24.809,18.191 23.854,19.146 cw(c24.707,20) 23.5,20 23.5,39.23 ; 19,0 71.23,0 ccw(c71.23,1.27) 72.5,1.27 72.5,8.73 ccw(c71.23,8.73) 71.23,10 66.27,10 cw(c66.27,11.27) 65,11.27 65,17.73 cw(c66.27,17.73) 66.27,19 ; 19,0 19,0 ; 23.5,39.23 cw(c24.77,39.23) 24.77,40.5 ; 23.5,39.23 23.5,39.23 ; 24.77,40.5 24.77,40.5 ; 24.77,40.5 74.23,40.5 ; 66.27,19 74.25,19 ccw(c74.25,20.25) 75.5,20.25 75.5,39.23 ccw(c74.23,39.23) 74.23,40.5 ; 66.27,19 66.27,19 ; 74.23,40.5 74.23,40.5

## Silkscreen, mask and mechanical layers (free items; w line width, h text height)
Top Overlay:
  text "Eye tracker main board" at 24.25,22.25 h1.2
Bottom Overlay:
  lines w0.254: 39.25,34 ccw(c40.25,34) 40.25,33 40.459,33 cw(c40.459,31.73) 41.729,31.73 41.729,31.295 ; 42,34 42,33.219 ccw(c43.27,33.219) 43.27,31.949 ; 45.48,28.191 cw(c45.48,26.921) 46.75,26.921 46.75,20.75
  text "My Corona..." at 63.25,16.5 h4
  text "(C) 2020 Voidstar Lab  / v1 '.ModifiedDate'" at 26.873,12.627 h1.2 r270
  text "Nana nana na na  / na na nana nana / nana nana na na  / na na nana nana" at 63.25,10.25 h3
  text "My my my my my WHOO!" at 63.25,8.655 h2
Top Solder:
  text "VOIDSTAR LAB" at 25.4,35.35 h5
Mechanical 1:
  lines w0.254: 18.999,10 23.73,10 ccw(c23.73,11.27) 25,11.27 25,17.73 ccw(c24.348,17.73) 24.809,18.191 23.854,19.146 cw(c24.707,20) 23.5,20 23.5,39.23 cw(c24.77,39.23) 24.77,40.5 74.23,40.5 cw(c74.23,39.23) 75.5,39.23 75.5,20.27 cw(c74.23,20.27) 74.23,19 66.27,19 ccw(c66.27,17.73) 65,17.73 65,11.27 ccw(c66.27,11.27) 66.27,10 71.23,10 cw(c71.23,8.73) 72.5,8.73 72.5,1.27 cw(c71.23,1.27) 71.23,0 19,0 cw(c19,1.27) 17.73,1.27 17.73,8.73 cw(c19,8.73) 19,10 ; 76.5,34 76.5,40.5